# Allegro board sld_hw01.brd
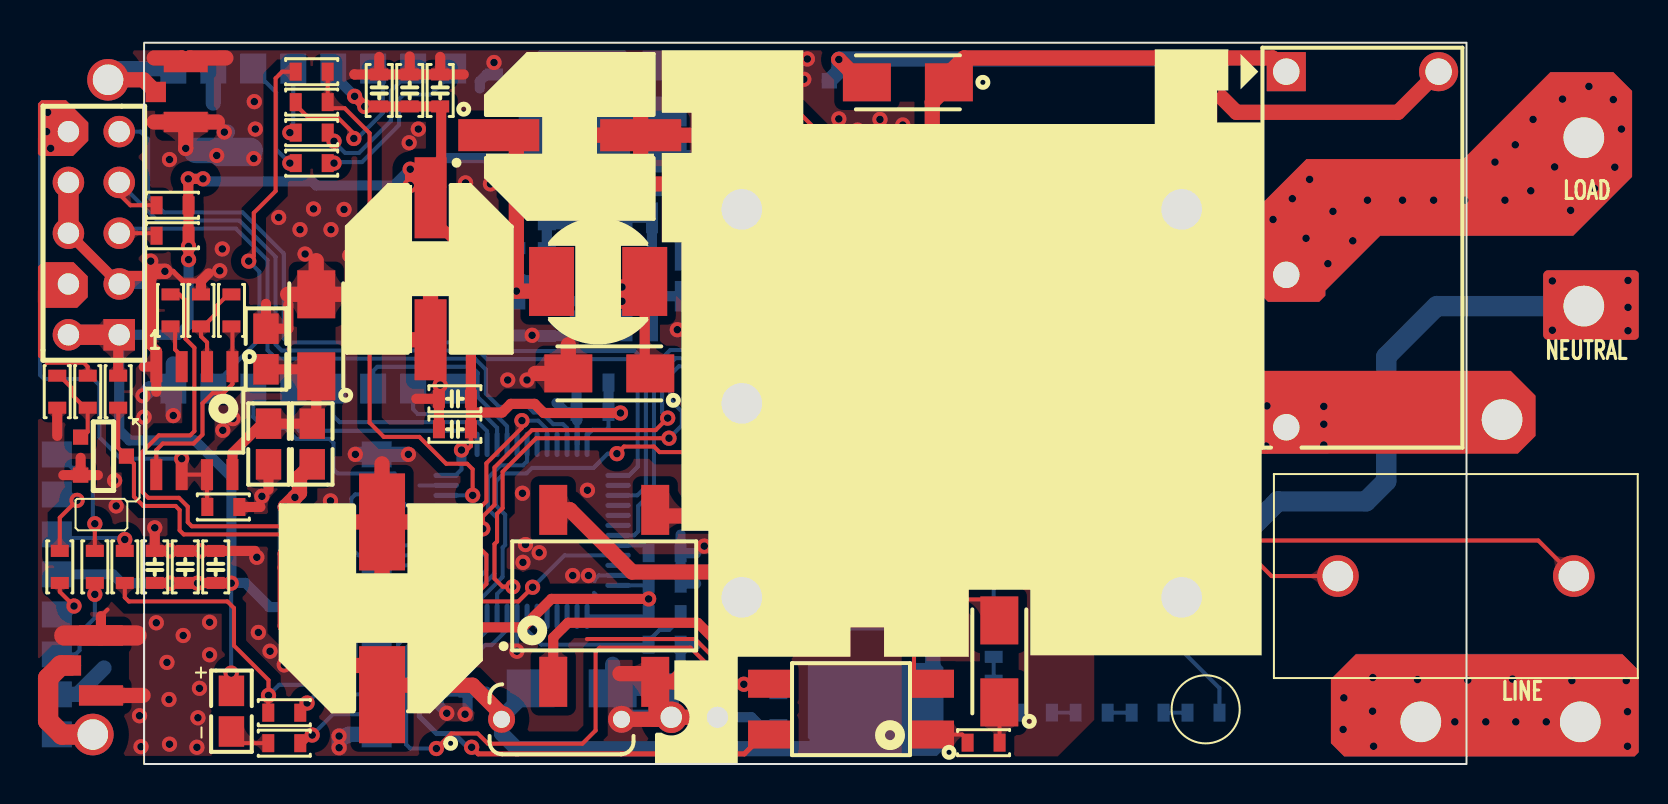
[diagram p0: board, top side]
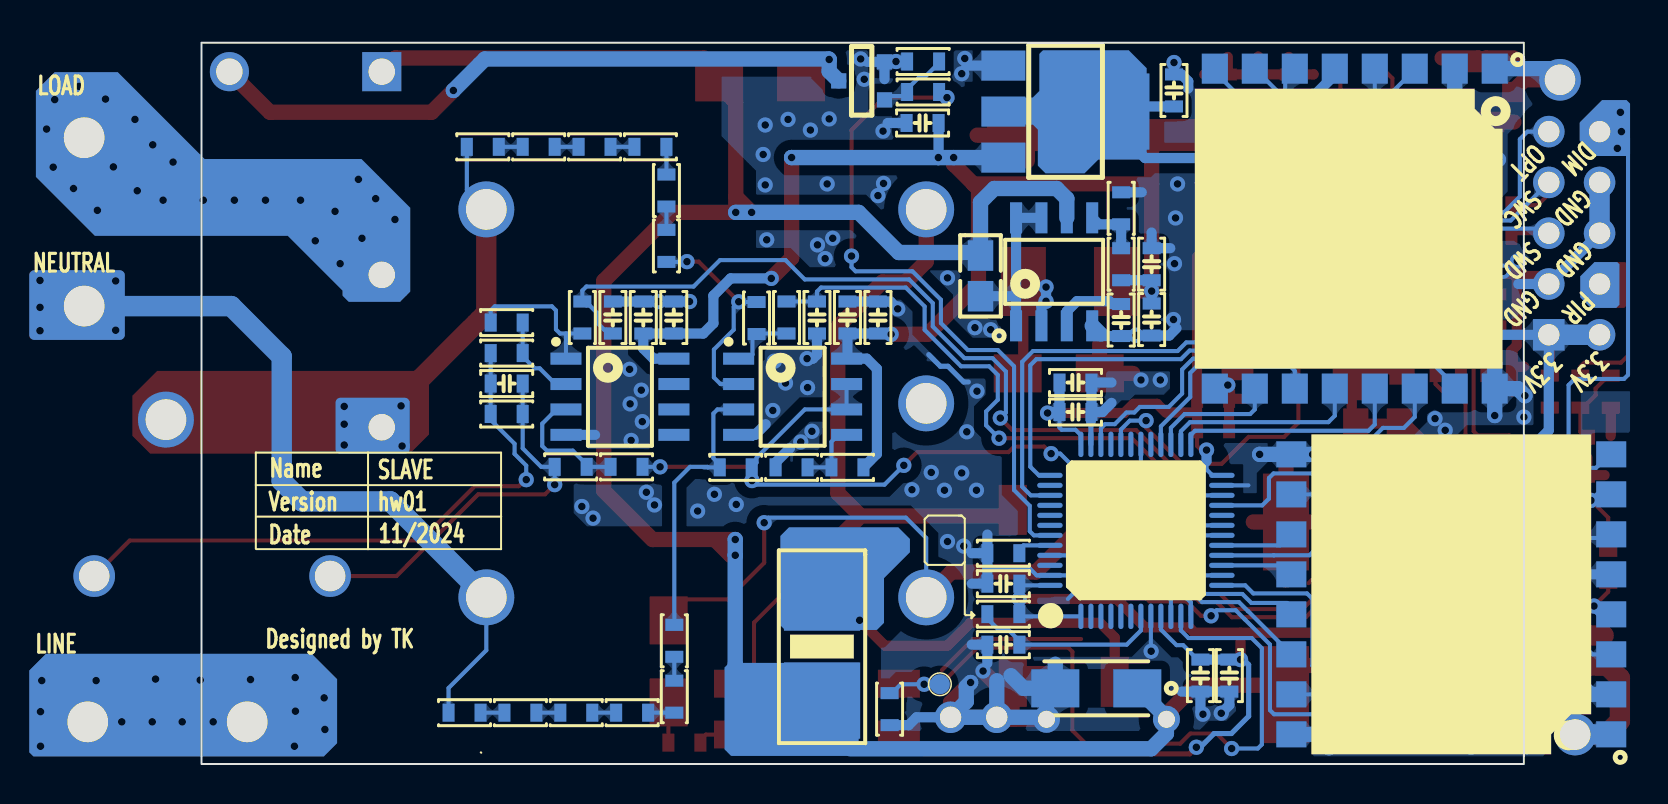
[diagram p1: board, bottom side, seen from below]

Outline 66.14 x 36.07 mm; copper layers: TOP, BOTTOM. Coordinates in mm from the lower left corner of the outline.
Outline path: rectangle 0,0 66.14,36.07

## Design rules (mm)
constraint set DEFAULT: min track width 0.203
nets with their own width: min track width 0.203; nets GND

## Placement (name value [footprint] x y rotation side)
C1  1uF  [C0603]  42.52 22.33 90 bottom
C2  0.1uF  [C0603]  3.58 9.86 90 top
C3  0.1uF  [C0603]  18.62 22.23 270 bottom
C4  0.1uF  [C0805]  6.22 16 0 top
C5  0.1uF  [C0603]  15.54 18.26 180 top
C6  1uF  [C0603]  15.54 16.74 180 top
C7  0.1uF  [C0603]  22.43 19.08 180 bottom
C8  1uF  [C0603]  22.43 17.6 180 bottom
C9  0.1uF  [C0603]  16.18 4.42 270 bottom
C10  1uF  [C0603]  14.73 4.42 270 bottom
C11  0.1uF  [C0603]  26.03 9.02 0 bottom
C12  0.1uF  [C0603]  26.03 5.97 0 bottom
C13  0.1uF  [C0603]  11.76 33.68 90 top
C14  0.01uF  [C0603]  18.62 24.99 90 bottom
C15  1uF  [C0603]  14.81 33.68 90 top
C16  470uF  [RAD_SIZE_F]  14.33 24.77 270 top
C17  470pF  [C0603]  20.14 22.2 270 bottom
C18  1uF  [C0603]  13.28 33.68 90 top
C19  0.1uF  [C0603]  44.04 22.33 90 bottom
C20  1uF  [C0603]  0.53 9.86 90 top
C21  0.1uF  [CAP104J100V]  20.88 2.24 0 top
C22  220uF  [CASE_G]  11.9 7.79 90 top
C23  1uF  [C0603]  2.06 9.86 90 top
C24  0.01uF  [C0603]  35.36 22.33 270 bottom
C25  0.01uF  [C0603]  50.88 19.02 180 bottom
C26  0.01uF  [C0603]  45.57 22.33 90 bottom
C27  0.1uF  [C0603]  30.07 32.05 0 bottom
C28  0.1uF  [C0603]  17.5 33.68 90 bottom
C29  1uF  [C0603]  33.83 22.33 90 bottom
C30  0.1uF  [C0603]  32.31 22.33 90 bottom
C31  470uF  [RAD_SIZE_F]  21.28 31.45 0 top
CT1  -  [ZMCT103]  65.61 9.4 180 top
D1  1N4007WDITR  [DO_214AC]  42.77 5.13 90 top
D4  RB050L  [DO_214AC]  23.27 19.53 180 top
D6  1N4007WDITR  [DO_214AC]  38.2 34.09 180 top
D7  0805  [D0805]  4.37 2.64 0 top
D8  DB107S  [DB_1S]  23.01 8.41 90 top
DZ1  24V  [DO_214]  8.61 21.44 90 top
DZ2  36V  [DO_214]  21.39 3.78 0 bottom
J4  -  [HEADER2X5]  -2.52 26.54 90 top
L1  100uH  [CHOKESIZE6MM]  22.71 24.13 180 top
NOREF  -  []  -5.69 0 90 top
NOREF#2  -  []  -5.69 36.07 0 top
Q1  MMBT2222  [SOT_23]  31.98 33.21 90 bottom
Q2  MMBT2222  [SOT_23]  -3.18 16.34 270 top
R1  10K  [R0805]  6.1 20.75 180 top
R2  10K  [R0603]  -1.3 18.62 270 top
R3  10K  [R0603]  -2.82 18.62 270 top
R4  22K  [R0603]  41.99 1.07 180 top
R5  2.2K  [R0805]  8.41 16 180 top
R6  0  [R0603]  8.38 34.62 0 top
R7  10K  [R0603]  31.72 2.74 270 bottom
R8  10K  [R0603]  26.03 7.49 0 bottom
R9  10K  [R0603]  26.03 10.54 0 bottom
R10  470  [R0603]  1.32 22.68 270 top
R11  4.7K  [R0603]  2.84 22.68 90 top
R12  10K  [R0603]  4.37 22.68 270 top
R13  10K  [R0603]  3.96 12.85 0 top
R14  2.2K  [R0603]  30.05 33.6 0 bottom
R15  10K  [R0603]  30.05 35.13 0 bottom
R17  2.2K  [R0603]  7.01 1.04 0 top
R18  2.2K  [R0603]  1.42 26.42 180 top
R19  2.2K  [R0603]  1.42 27.94 180 top
R20  0.33  [R0805]  27.18 24.41 180 bottom
R21  4.7K  [R0603]  20.14 24.99 90 bottom
R22  1.5K  [R0603]  20.14 27.79 90 bottom
R23  0  [R0603]  7.01 2.57 180 top
R24  56K  [R0603]  -4.34 18.62 270 top
R25  56  [R0603]  50.88 17.5 0 bottom
R26  10K  [R0603]  50.88 20.55 0 bottom
R27  10K  [R0603]  47.67 14.86 0 bottom
R28  49.9k  [R0603]  44.88 14.86 180 bottom
R29  49.9k  [R0603]  50.88 22.07 0 bottom
R30  0  [R0603]  8.38 31.57 0 top
R31  0  [R0603]  8.38 30.05 0 top
R32  0  [R0603]  8.38 33.1 180 top
R33  0.01  [R2512]  35.1 5.87 270 bottom
R34  0  [R0603]  -4.22 9.86 90 top
R35  0  [R0603]  -2.46 9.86 90 top
R36  0  [R0603]  -0.97 9.86 90 top
R37  300k  [R0603]  52.07 30.86 180 bottom
R38  300k  [R0603]  49.27 30.86 180 bottom
R39  300k  [R0603]  46.48 30.86 180 bottom
R40  300k  [R0603]  43.69 30.86 180 bottom
R41  300k  [R0603]  42.89 28.68 270 bottom
R42  300k  [R0603]  42.89 25.91 270 bottom
R43  4.99k  [R0603]  38.38 22.3 270 bottom
R44  1k  [R0603]  36.88 22.33 90 bottom
R45  300k  [R0603]  52.98 2.57 180 bottom
R46  300k  [R0603]  50.19 2.57 180 bottom
R47  300k  [R0603]  47.4 2.57 180 bottom
R48  300k  [R0603]  44.6 2.57 180 bottom
R49  300k  [R0603]  42.49 3.37 90 bottom
R50  300k  [R0603]  42.49 6.16 90 bottom
R51  4.99k  [R0603]  39.42 14.83 180 bottom
R52  10K  [R0603]  33.83 14.83 0 bottom
R53  4.99k  [R0603]  36.63 14.83 0 bottom
R54  1k  [R0603]  47.09 22.33 90 bottom
RE1  ALQ324  [RELAY_SPST_20MX10MX10M]  60.93 25.73 270 top
T1  Test_Point_Pwr_60  [TEST_POINT_PWR_60]  -1.8 34.21 0 top
T2  Test_Point_Pwr_80  [TEST_POINT_PWR_80]  63.85 2.11 180 bottom
T3  ZERO  [TESTPOINT_SIG]  29.21 3.99 180 bottom
T6  Test_Point_Pwr  [TEST_POINT_PWR]  26.36 2.34 180 bottom
T7  Test_Point_Pwr  [TEST_POINT_PWR]  28.68 2.34 180 bottom
T12  Test_Point_Pwr_60  [TEST_POINT_PWR_60]  -2.57 1.47 0 top
T13  Test_Point_Pwr_80  [TEST_POINT_PWR_80]  67.92 17.22 0 top
T14  Test_Point_Pwr_80  [TEST_POINT_PWR_80]  71.83 2.11 0 top
T15  Test_Point_Pwr_80  [TEST_POINT_PWR_80]  72.01 31.32 0 top
T16  Test_Point_Pwr_80  [TEST_POINT_PWR_80]  72.01 22.9 0 top
U1  PC817  [SOT254P900X350-4N]  35.36 2.74 180 top
U2  SMD_MINI  [ANTENNA_MOUNT]  2.08 33.6 180 top
U3  STM32F071C8T6  [LQFP_48]  19.41 11.68 180 bottom
U4  RFM69HCW_868/RFM22B_433  [RFM22B_S2]  8.46 26.77 270 bottom
U6  MC34063  [SOIC8]  23.49 24.61 90 bottom
U7  SMD_MINI  [ANTENNA_MOUNT]  -2.16 4.93 180 top
U8  AMS1117-3V3  [SOT_223_3]  26.03 34.92 270 bottom
U9  12VAC  [ZN35135BA_220V24V]  40.89 18.03 180 top
U10  LM358  [SOIC8]  45.21 18.36 180 bottom
U11  RFM69HCW_868/RFM22B_433  [RFM22B_S2]  3.63 8.48 0 bottom
U12  LM358  [SOIC8]  36.57 18.36 180 bottom
U14  LM358  [SOIC8]  2.51 17.17 270 top

## Library data of the parts
C1-C3 C5-C15 C17-C20 C23-C30 = NPOL_CAP: User Part Number: ***
C4 C21 = NPOL_CAP
C16 C22 C31 = POL_CAP
CT1 = ZMCT103
D1 D4 D6 = DIODE_AC
D7 = LED
D8 = DIODE_BRIDGE_2
DZ1 DZ2 = ZENER
J4 = HEADER2X5
L1 = IND_FERRITE
Q1 Q2 = BJT_NPN
R1 R5 R20 R33 = RES
R2-R4 R6-R15 R17-R19 R21-R24 R26-R32 R34-R54 = RES: User Part Number: ***
R25 = RESR: User Part Number: ***
RE1 = RELAY_24V_MINI
T1-T3 T6 T7 T12-T16 = TestPoint
U1 = PC817
U2 U7 = ANT_SMD_MINI
U3 = STM32F103_48P
U4 U11 = RFM69HCW
U6 = MC34063_2
U8 = LM1117X_4P
U9 = ZN35150BA: Tolerance: ***; User Part Number: ***
U10 U12 = LM358_0
U14 = LM358_4

## Footprints (pads in the part's own frame, mm; a bottom-side part is the same pattern mirrored in y, then rotated)
ANTENNA_MOUNT
  rect 2.2x1.02 smd: 1(0,1.5) 2(0,-1.5)
  rect 1.016x1.016 smd: 3(1.5,0)
C0603
  rect 0.6x0.9 smd: 1(-0.8,0) 2(0.8,0)
C0805
  rect 1.27x1.524 smd: 1(0,1.016) 2(0,-1.016)
CAP104J100V
  round 1.35 hole 0.85: 1(-3,0) 2(3,0)
CASE_G
  rect 4.85x2.3 smd: 1(-4.318,0) 2(4.318,0)
CHOKESIZE6MM
  rect 2.25x3.45 smd: 1(-2.33,0) 2(2.33,0)
D0805
  rect 1.27x1.524 smd: 1(0,1.016) 2(0,-1.016)
DB_1S
  rect 2.5x1.4 smd: 1(-4.3,2.55) 2(-4.3,-2.55) 3(4.3,-2.55) 4(4.3,2.55)
DO_214
  rect 2.4x1.9 smd: 1(2.05,0) 2(-2.05,0)
DO_214AC
  rect 2.4x1.9 smd: A(2.05,0) C(-2.05,0)
HEADER2X5
  rect 1.575x1.575 hole 1.067: 1(-5.08,-1.27)
  round 1.575 hole 1.067: 2(-5.08,1.27) 3(-2.54,-1.27) 4(-2.54,1.27) 5(0,-1.27) 6(0,1.27) 7(2.54,-1.27) 8(2.54,1.27) 9(5.08,-1.27) 10(5.08,1.27)
LQFP_48
  oval 0.254x1.27 smd: 1(-2.75,-4.3) 2(-2.25,-4.3) 3(-1.75,-4.3) 4(-1.25,-4.3) 5(-0.75,-4.3) 6(-0.25,-4.3) 7(0.25,-4.3) 8(0.75,-4.3) 9(1.25,-4.3) 10(1.75,-4.3) 11(2.25,-4.3) 12(2.75,-4.3) 25(2.75,4.3) 26(2.25,4.3) 27(1.75,4.3) 28(1.25,4.3) 29(0.75,4.3) 30(0.25,4.3) 31(-0.25,4.3) 32(-0.75,4.3) 33(-1.25,4.3) 34(-1.75,4.3) 35(-2.25,4.3) 36(-2.75,4.3)
  oval 1.27x0.254 smd: 13(4.3,-2.75) 14(4.3,-2.25) 15(4.3,-1.75) 16(4.3,-1.25) 17(4.3,-0.75) 18(4.3,-0.25) 19(4.3,0.25) 20(4.3,0.75) 21(4.3,1.25) 22(4.3,1.75) 23(4.3,2.25) 24(4.3,2.75) 37(-4.3,2.75) 38(-4.3,2.25) 39(-4.3,1.75) 40(-4.3,1.25) 41(-4.3,0.75) 42(-4.3,0.25) 43(-4.3,-0.25) 44(-4.3,-0.75) 45(-4.3,-1.25) 46(-4.3,-1.75) 47(-4.3,-2.25) 48(-4.3,-2.75)
R0603
  rect 0.6x0.9 smd: 1(-0.8,0) 2(0.8,0)
R0805
  rect 1.27x1.524 smd: 1(0,1.016) 2(0,-1.016)
R2512
  rect 3.81x3.81 smd: 1(-2.7,0) 2(2.7,0)
RAD_SIZE_F
  rect 4.05x1.6 smd: 1(-3.55,0) 2(3.55,0)
RELAY_SPST_20MX10MX10M
  rect 1.956x1.956 hole 1.321: 1(-8.89,-3.81)
  round 1.956 hole 1.321: 2(-8.89,3.81) 3(1.27,-3.81) 4(8.89,-3.81)
RFM22B_S2
  rect 1.501x1.301 smd: 1(-8,7) 2(-8,5) 3(-8,3) 4(-8,1) 5(-8,-1) 6(-8,-3) 7(-8,-5) 8(-8,-7) 9(8,-7) 10(8,-5) 11(8,-3) 12(8,-1) 13(8,1) 14(8,3) 15(8,5) 16(8,7)
SOIC8
  rect 1.55x0.6 smd: 1(-2.7,1.905) 2(-2.7,0.635) 3(-2.7,-0.635) 4(-2.7,-1.905) 5(2.7,-1.905) 6(2.7,-0.635) 7(2.7,0.635) 8(2.7,1.905)
SOT254P900X350-4N
  rect 2.1x1.4 smd: 1(-4.1,1.27) 2(-4.1,-1.27) 3(4.1,-1.27) 4(4.1,1.27)
SOT_23
  rect 0.762x0.762 smd: 1(0,0) 2(1.9,0) 3(0.95,2.291)
SOT_223_3
  rect 1.5x2.2 smd: 1(0,0) 2(2.3,0) 3(4.6,0)
  rect 3.81x2.007 smd: 4(2.3,6.3)
TEST_POINT_PWR
  round 1.575 hole 1.067: 1(0,0)
TEST_POINT_PWR_60
  round 2.083 hole 1.524: 1(0,0)
TEST_POINT_PWR_80
  round 2.794 hole 2.032: 1(0,0)
TESTPOINT_SIG
  round 1 smd: 1(0,0)
ZMCT103
  round 2.083 hole 1.524: 1(-5.9,0) 2(5.9,0)
ZN35135BA_220V24V
  round 2.794 hole 2.032: 1(-11,9.7) 2(-11,-9.7) 3(11,9.7) 4(11,0) 5(11,-9.7)

## Nets
5V: C1.1 C3.1 C14.1 C19.1 C27.1 C29.1 C30.1 C31.1 L1.2 R21.1 R52.1 U8.3 U10.8(V+) U12.8(V+)
24V: C21.1 C22.1 D6.C(CATHODE) DZ2.2(CATHODE) R5.1 R20.1 R33.2 RE1.1 U6.6(VCC)
24VAC1: D8.3 U1.2 U9.5
24VAC2: D1.A D8.4 U9.3
+3.3V: C2.1 C5.1 C6.1 C7.1 C8.1 C9.1 C10.1 C11.1 C13.1 C15.1 C16.1 C18.1 C20.1 C23.1 C28.1 D7.1 J4.1 J4.2 R2.1 R8.1 R18.1 R19.1 U1.4 U3.1 U3.9 U3.24 U3.36 U3.48 U4.5(VCC) U8.2 U8.4(OUT_PAD) U11.5(VCC)
GND: C1.2 C2.2 C3.2 C4.2 C5.2 C6.2 C7.2 C8.2 C9.2 C10.2 C11.2 C12.2 C13.2 C14.2 C15.2 C16.2 C17.2 C18.2 C19.2 C20.2 C21.2 C22.2 C23.2 C24.2 C26.2 C27.2 C28.2 C29.2 C30.2 C31.2 D4.A D8.2(AC2) DZ1.1 DZ2.1 J4.3 J4.6 J4.8 Q1.2 Q2.2 R1.2 R7.2 R9.2 R11.2 R13.2 R15.2 R22.2 R24.2 R53.2 T6.1(T) T7.1(T) U2.1 U2.2(GND1) U3.8 U3.23 U3.35 U3.47(VSS_3) U4.2 U4.9 U4.16 U6.4 U7.1 U7.2(GND1) U8.1 U10.4 U11.2 U11.9 U11.16 U12.4 U14.4
AC_LINE: R37.1 RE1.4 T13.1(T) U9.2(N)
AC_LINE_IN: T2.1(T) T14.1(T)
AC_LOAD: RE1.3 T15.1(T)
AC_NEUTRAL: R45.1 T16.1(T) U9.1
BTN1: U3.29
CUR_ADC: C26.1 R54.2 U3.19
LED1: R17.2 U3.45
MISO: U3.16 U11.10
MOSI: U3.17 U11.11
N15558930_RF4: R30.1 U4.4
N15558930_RF5: R34.1 U11.4
N15558945_RF4: R31.1 U4.3
N15558945_RF5: R35.1 U11.3
N15601498_RF4: T1.1(T) U2.3 U4.1
N15601498_RF5: T12.1(T) U7.3 U11.1
N15650649_RF4: R31.2 U4.8
N15650649_RF5: R35.2 U11.8
N15650655_RF4: R30.2 U4.7
N15650655_RF5: R34.2 U11.7
N15650752_RF4: R32.2 U4.6
N15650752_RF5: R36.2 U11.6
N15650833_RF4: R6.1 U4.15
N15650833_RF5: R23.1 U11.15
OPT: J4.9 U3.39
PB2: U3.20
PB5: U3.41
PB9: U3.46
PC13: U3.2
PIR_IN: J4.4 R3.1
RF_INT: R23.2 R36.1 U3.13
RF_RST: U3.30 U11.14
SCK: U3.15 U11.12
SPI2_INT: R6.2 R32.1 U3.22
SPI2_MISO: U3.27 U4.10
SPI2_MOSI: U3.28 U4.11
SPI2_RES: U3.21 U4.14
SPI2_SCK: U3.26 U4.12
SPI2_SS: U3.25 U4.13
SS: U3.18 U11.13
VOL_ADC: C24.1 R44.2 U3.10
VREF_ADC: R28.2 R51.2 U3.12 U12.6 U12.7
ZDET: R7.1 T3.1(T) U1.3(EMITTER) U3.11
N00867: R10.1 U3.14
N00967: R14.1 U3.43
N15474073: C12.1 R8.2 U3.7
N15474105: R9.1 U3.44
N15491277: D7.2(CATHODE) R17.1
N15550331: Q2.1 R3.2 R24.1
N15564877: D1.C(CATHODE) R4.1
N15564897: R4.2 U1.1
N15565413: Q1.1 R14.2 R15.1
N15565460: D6.A Q1.3(E) RE1.2(DC-)
N15594848: R10.2 U14.3
N15594876: R12.2 U14.1 U14.5
N15594888: R11.1 R12.1 U14.2
N15595203: D8.1 R33.1
N15595433: C4.1 DZ1.2(CATHODE) R1.1 R5.2 U14.8(V+)
N15595748: J4.10 R13.1 U14.6 U14.7
N15595994: J4.5 R18.2 U3.34
N15596016: J4.7 R19.2 U3.37
N15599824: R37.2 R38.1
N15599840: R38.2 R39.1
N15599857: R39.2 R40.1
N15599867: R40.2 R41.1
N15599873: R41.2 R42.1
N15599887: R45.2 R46.1
N15599893: R46.2 R47.1
N15599899: R47.2 R48.1
N15599905: R48.2 R49.1
N15599911: R49.2 R50.1
N15600412: R42.2 R43.1 U12.2
N15600419: R50.2 R51.1 U12.3
N15600461: R43.2 R44.1 U12.1
N15606589: Q2.3(E) R2.2 U3.32
N15830972: D4.C(CATHODE) L1.1 U6.2
N15831035: R52.2 R53.1 U12.5
N15831096: R20.2 U6.1 U6.7 U6.8
N15831168: C17.1 U6.3
N15831176: R21.2 R22.1 U6.5
N15832751: C25.1 CT1.1 R25.2 R26.2
N15832799: C25.2 CT1.2 R25.1 R27.2
N15832926: R27.1 R28.1 U10.3
N15832941: R26.1 R29.1 U10.2
N15833292: R29.2 R54.1 U10.1

Pads without a net: U3 3 4 5 6 31 33 38 40 42; U9 4; U10 5 6 7

## Via types
v1: diameter 0.762, hole 0.381, TOP to BOTTOM, 265 vias

## Routing (per net, layer and track width the routed paths; a pad name or vN(x,y) marks a point on that pad's centre or on a via; arc(x,y) is an arc through that point)
5V: length 76.3
  TOP w0.762: 27.53,29.01 28.52,29.99 v1(28.52,30.33) v1(29.29,30.33) ; 27.53,29.01 18.62,29.01 ; 27.53,29.01 27.28,28.75 27.28,24.03 29.82,21.49 v1(31.65,21.49) ; v1(37.64,24.28) 36.63,25.3 v1(36.63,30.33) 36.62,30.33 ; L1.2 19.9,23.65 v1(18.62,23.65) 18.62,29.01 ; 18.62,29.01 18.62,30.94 18.11,31.45 C31.1
  BOTTOM w0.508: R52.1 32.36,15.51 32.36,19.76 32.87,20.27 U12.8 33.83,20.31 C29.1 C30.1 31.69,21.53 v1(31.65,21.49) ; v1(37.64,24.28) 39.67,24.28 40.54,23.42 40.54,22.03 41.05,21.53 C1.1 C19.1 44.04,20.78 43.53,20.27 U10.8 ; v1(28.52,30.33) 28.52,30.33 29.27,30.33 C27.1 ; C14.1 18.62,24.19 v1(18.62,23.65) ; C14.1 R21.1 ; C14.1 C3.1
  BOTTOM w0.762: U8.3 v1(28.52,30.33) v1(29.29,30.33) 36.62,30.33 v1(36.63,30.33)
24V: length 126.3
  TOP w0.762: 39.42,28.38 v1(39.42,27.58) ; 39.42,28.38 v1(38.63,27.58) v1(39.42,27.58) ; 39.42,28.38 39.42,33.1 40.25,33.93 D6.C 40.25,34.54 41.01,35.31 56.44,35.31 RE1.1 ; v1(39.42,27.58) 42.59,27.58 46.02,24.16 46.02,13.67 43.58,11.22 40.46,11.22 ; 40.46,11.22 v1(39.45,11.22) v1(39.45,10.44) 39.67,10.44 40.46,11.22 ; v1(7.06,12.85) v1(7.54,13.34) 7.77,13.56 7.77,14.35 R5.1 ; C21.1 17.88,2.49 16.43,3.94 12.37,3.94 C22.1 11.9,4.17 11.14,4.93 9.04,4.93 7.06,6.91 v1(7.06,9.82) v1(7.06,10.52)
  BOTTOM w0.762: 39.45,4.11 v1(39.45,10.44) v1(39.45,11.22) ; v1(7.06,9.82) v1(7.06,10.52) v1(7.06,12.85) v1(7.54,13.34) ; v1(39.42,27.58) v1(38.63,27.58) 33.27,27.58 31.27,25.58 27.33,25.58 R20.1 27.18,28.09 26.49,28.78 23.37,28.78 22.86,28.27 U6.6 ; DZ2.2 17.88,2.33 C21.1 17.88,1.52 18.64,0.76 33.7,0.76
24VAC1: length 37.5
  TOP w0.203: 35.12,10.45 38.51,7.07 38.51,4.22 38.71,4.01 U1.2
  TOP w0.762: D8.3 25.87,12.4 33.17,12.4 ; 33.17,12.4 34.31,13.55 34.31,21.87 32.08,24.1 30.91,24.1 29.89,25.12 U9.5 ; 33.17,12.4 35.12,10.45
24VAC2: length 31.3
  TOP w0.203: v1(38,12.06) 38,10.06 39.83,8.23 42.57,8.23 42.77,8.03 D1.A
  TOP w0.762: U9.3 28.63,9.6 24.41,9.6 21.3,12.71 D8.4
  BOTTOM w0.203: U9.3 29.89,11.3 30.91,12.32 37.79,12.32 38,12.12 v1(38,12.06)
+3.3V: length 186.3
  TOP w0.203: v1(4.36,4.55) 4.36,3.67 D7.1 ; C6.1 16.34,15.9 16.14,15.7 v1(15.87,15.7)
  TOP w0.254: v1(16.38,0.84) 16.71,0.51 30.02,0.51 30.99,1.47 U1.4
  TOP w0.508: 9.6,7.11 v1(8.76,7.11) v1(8.76,7.85) 8.86,7.85 9.6,7.11 ; 9.6,7.11 10.15,6.56 14.17,6.56 ; C15.1 14.78,32.85 ; C15.1 14.86,32.83 14.86,28.85 C16.1 ; C15.1 C18.1 C13.1 v1(11.04,32.88) v1(10.53,33.39) ; 13.31,29.33 13.82,29.33 14.33,28.82 ; 13.31,29.33 v1(13.31,28.93) 13.71,28.93 C16.1 ; 13.31,29.33 v1(13.31,29.74) 13.82,29.74 14.33,29.24 14.33,28.82 ; C16.1 14.33,28.82 ; C16.1 14.33,27.38 16.34,25.36 C5.1 16.34,17.58 ; v1(1.32,9.04) v1(2.67,9.04) ; C20.1 C23.1 C2.1 3.59,9.04 v1(4.36,9.04) ; R2.1 -1.3,21.41 J4.1 ; v1(25.23,8.26) 20.37,8.26 18.95,6.83 16.74,6.83 16.47,6.56 14.17,6.56 ; v1(14.17,5.22) 14.17,6.56 ; v1(2.22,25.22) v1(2.22,25.88) R18.1 R19.1 2.21,27.95 v1(2.21,29.26) v1(2.95,29.26) ; v1(23.82,17.55) 19.99,17.55 19.53,18.01 18.34,18.01 17.91,17.58 16.34,17.58 ; 16.34,17.58 C6.1
  TOP w1.016: J4.2 J4.1
  BOTTOM w0.203: U3.1 25.12,7.38 R8.1 ; v1(4.36,4.55) v1(4.36,9.04) ; U3.48 25.15,8.93 C11.1 ; C9.1 16.32,5.22 17.04,5.94 17.37,5.94 18.16,6.73 U3.9 ; U3.36 22.16,16.44 22.43,16.71 23.11,16.71 23.23,16.83 C8.1 ; 15.87,15.14 15.87,14.73 15.58,14.43 U3.24
  BOTTOM w0.254: v1(14.17,5.22) 14.02,5.22 13.77,4.97 13.77,2.39 14.63,1.52 15.49,1.52 16.18,0.84 v1(16.38,0.84)
  BOTTOM w0.508: R8.1 v1(25.23,8.26) C11.1 ; 14.12,29.74 14.32,29.74 14.88,30.3 18.95,30.3 20.62,31.98 ; 14.12,29.74 v1(13.31,29.74) ; 14.12,29.74 v1(13.31,28.93) ; v1(2.22,25.88) v1(2.22,25.22) 2.22,21.97 1.71,21.46 J4.1 -1.25,16.69 -0.74,16.18 2.54,16.18 4.37,14.35 4.37,9.06 ; 4.37,9.06 5.07,9.06 6.25,7.87 6.25,7.85 8,7.85 ; 4.37,9.06 v1(4.36,9.04) v1(2.67,9.04) v1(1.32,9.04) -1.12,9.04 -1.56,9.48 U11.5 ; 12.5,28.93 8.61,28.93 8.41,29.13 3.07,29.13 v1(2.95,29.26) v1(2.21,29.26) ; 12.5,28.93 v1(13.31,29.74) ; 12.5,28.93 v1(13.31,28.93) ; v1(14.17,5.22) C10.1 C9.1 ; 23.41,17.55 v1(23.82,17.55) 23.77,17.6 C8.1 C7.1 ; v1(13.31,29.74) v1(13.31,28.93) ; 8,7.85 8.74,7.11 v1(8.76,7.11) v1(8.76,7.85) 8,7.85 ; U4.5 9.46,34.46 v1(10.53,33.39) v1(11.04,32.88) ; C28.1 19.14,32.88 ; v1(15.87,15.7) 15.87,15.14
  BOTTOM w1.016: J4.1 J4.2
GND: length 214.9
  TOP w0.203: 3.66,35.1 U2.2 0.5,35.1 ; 22.15,6.25 27.56,6.25 29.11,4.7 ; 10.77,9.04 10.16,9.65 10.16,9.73 ; -2.16,7.39 -1.83,7.72
  TOP w0.254: v1(1.04,24.64) 1.45,24.64 1.93,24.16 2.84,24.16
  TOP w0.508: -0.02,19.87 U14.4 ; U14.4 0.63,19.9 0.63,20.65 0.35,20.93 0.35,24.33 0.28,24.41 -0.84,24.41 J4.3 J4.6 ; U14.4 0.61,18.61 ; 7.21,22.98 7.21,21.77 R1.2 6.1,23.01 ; U7.2 -2.16,7.39 ; C5.2 C6.2 ; C5.2 13.61,18.26 ; C5.2 14.74,18.89 ; C13.2 10.53,34.48 10.51,34.49 ; C13.2 11.76,35.36 ; C13.2 C18.2 ; Q2.2 -4.04,14.45 ; Q2.2 -2.31,14.45 ; Q2.2 -3.18,15.31 ; 13.28,35.38 C18.2 ; C18.2 C15.2 ; C16.2 14.74,20.8 14.74,18.89 ; 14.74,18.89 v1(14.81,18.95) ; C15.2 14.81,35.36 ; C15.2 15.99,34.48 ; 5.55,10.66 C2.2 v1(2.82,10.66) C23.2 v1(1.29,10.66) C20.2 v1(0.53,11.81) ; R13.2 5.82,12.85 ; 3.22,24.54 2.84,24.16 R11.2 ; R24.2 -4.34,16.41 ; C4.2 6.22,13.72
  TOP w0.762: 14.33,23.72 C16.2 13.04,21.21 ; C22.2 10.27,12.1 ; C22.2 11.9,15.01 ; C22.2 11.9,9.2 ; C22.2 13.53,12.1 ; DZ1.1 10.04,23.49 ; DZ1.1 8.61,25.17 ; DZ1.1 7.18,23.49 ; 0.28,24.41 0.51,24.64 v1(1.04,24.64) ; 23.8,4.52 25.15,4.52 D8.2 25.6,4.11 ; 21.22,20.97 D4.A 19.56,19.53 ; v1(27.05,4.65) 26.51,4.11 25.6,4.11 ; U2.1 0.5,32.1 ; U2.1 3.66,32.1 ; U2.1 v1(2.08,30.78) ; C21.2 25.53,2.24 ; 25.53,2.24 25.6,2.31 25.6,4.11 ; 25.53,2.24 26.26,2.24 T6.1 T7.1 28.68,3.07 v1(27.67,4.08) ; C31.2 24.83,30.16 ; C31.2 22.33,31.45 ; C31.2 27.34,31.45 ; C31.2 24.83,32.73 ; 0.51,35.31 1.88,35.31 U2.2 2.28,35.31 4.09,35.31 ; U7.1 -0.05,3.43
  TOP w1.016: J4.6 J4.8 ; -3.99,6.43 U7.2 -0.38,6.43
  BOTTOM w0.203: 22.5,8.56 22.81,8.26 ; 18.66,5.91 U3.8 ; 22.53,9.14 22.53,9.22 22.74,9.43 U3.47 24.37,9.43 24.72,9.79 24.73,9.78 26.83,9.78 ; U3.23 13.78,13.93 ; 27.68,8.94 27.61,9.02
  BOTTOM w0.254: 27.79,19.1 28.02,19.1 28.8,19.89 29.18,19.89 29.77,20.47 ; U3.35 21.66,17.16
  BOTTOM w0.508: v1(41.73,23.13) C1.2 v1(43.28,23.13) C19.2 C26.2 ; C29.2 C30.2 31.69,23.13 v1(31.32,22.76) ; R9.2 27.62,10.54 ; R9.2 C11.2 27.61,9.02 ; R9.2 26.83,11.47 ; U4.9 15.06,18.77 14.88,18.95 v1(14.81,18.95) ; U10.4 46.46,16.46 ; C9.2 17.11,3.62 ; C9.2 16.18,2.62 v1(16.05,2.49) ; C9.2 C10.2 14.73,2.95 v1(15.14,2.54) ; R7.2 30.77,1.94 30.38,2.34 T7.1 ; 21.18,21.5 21.08,21.4 C17.2 20.12,21.42 C3.2 17.74,21.42 17.37,21.79 ; C8.2 21.08,17.6 20.62,18.06 ; C8.2 C7.2 20.62,19.08 ; C8.2 21.66,17.57 21.66,17.16 ; 37.92,16.99 38.45,16.46 U12.4 ; 17.69,25.79 C14.2 18.62,26.58 ; R22.2 19.11,28.59 ; J4.6 J4.3 0.28,24 ; C24.2 35.36,20.47 35.56,20.27 v1(35.85,20.27) ; 16.79,33.78 16.79,34.14 17.13,34.48 C28.2 v1(17.5,35.08) ; R53.2 37.43,15.07 36.7,15.8 ; Q1.2 31.96,35.13 v1(31.4,35.13) R15.2 ; Q1.2 32.84,35.11 ; Q1.2 31.98,34.25 ; 26.83,5.04 C12.2 27.62,5.97 ; C27.2 31.83,32.05 ; U8.1 27.89,34.92
  BOTTOM w0.762: DZ2.1 23.88,3.34 C21.2 23.98,2.34 T6.1 ; DZ2.1 23.44,4.99 ; DZ2.1 25.02,3.78 25.65,4.42 ; v1(5.49,30.28) 3.73,30.28 3.33,30.68 ; 21.18,21.5 U6.4 ; v1(27.67,4.08) 27.89,3.86 27.89,3.12 T7.1 T6.1 ; T6.1 26.36,4.17 ; v1(-0.05,18.41) 0.3,18.77 U4.16 ; v1(10.57,15.48) U11.9 v1(13.22,15.48) ; -2.01,4.8 -3.32,3.48 U11.2 ; U4.16 1.46,20 ; U4.16 v1(1.46,17.42) ; v1(9.75,0.81) v1(9.75,1.4) 10.13,1.4 10.22,1.48 U11.16 ; v1(4.01,31.6) 4.16,31.6 ; U4.2 3.46,33.05
  BOTTOM w1.016: J4.8 J4.6
  BOTTOM w1.27: 2.59,30.68 5.31,30.68
  vias: v1(-1.47,14.17) v1(-1.4,12.9) v1(-0.23,2.41) v1(-0.15,0.86) v1(0,17.35) v1(0.33,25.15) v1(0.61,7.06) v1(1.14,5.08) v1(1.24,3.23) v1(1.27,30.23) v1(1.27,0.99) v1(1.95,6.43) v1(2.64,0.84) v1(2.69,2.31) v1(2.77,3.78) v1(3.28,7.09) v1(3.28,5.46) v1(3.63,30.43) v1(3.78,24.66) v1(3.91,25.76) v1(3.94,16.69) v1(4.44,17.27) v1(5.51,33.12) v1(5.56,31.75) v1(5.64,10.34) v1(5.71,6.58) v1(5.89,13.39) v1(6.3,5.64) v1(6.73,27.33) v1(7.01,4.95) v1(7.8,26.72) v1(8.05,25.5) v1(8.47,27.76) v1(8.71,12.45) v1(9.35,26.72) v1(9.32,13.16) v1(9.37,11.73) v1(10,27.73) v1(10.29,25.43) v1(12.27,24.28) v1(12.34,22.1) v1(12.44,25.98) v1(12.52,27.58) v1(13.26,31.06) v1(13.71,31.75) v1(13.66,25.43) v1(13.74,24.08) v1(15.11,24.59) v1(16.05,27.46) v1(16.08,29.06) v1(17.32,29.01) v1(17.42,27.3) v1(17.47,25.02) v1(17.52,22.23) v1(18.19,19.2) v1(18.64,5.64) v1(18.92,13.54) v1(18.95,10.08) v1(19.15,19.2) v1(19.07,10.97) v1(19.4,21.44) v1(19.76,10.57) v1(21.44,9.42) v1(22.17,13.69) v1(22.22,9.42) v1(26.67,21.72) v1(27.35,18.64) v1(27.46,21.82) v1(27.38,13.69) v1(27.86,16.61) v1(27.96,35.28) v1(28.02,10.9) v1(28.12,34.52) v1(28.12,14.55) v1(28.83,24.31) v1(28.83,11.13) v1(28.98,13.69) v1(29.64,14.58) v1(30.61,13.72) v1(32.05,31.65) v1(32.03,29.03) v1(32.31,28.42) v1(32.99,34.24) v1(33.17,35.26) v1(34.57,26.29) v1(34.75,32.26) v1(34.85,29.01) v1(34.95,25.27) v1(35.33,25.96) v1(35.61,16.64) v1(35.69,31.7) v1(35.83,18.82) v1(36.17,16.1) v1(36.8,32.23) v1(36.93,19.05) v1(37.49,20.14) v1(37.57,17.68) v1(37.95,31.95) v1(37.95,28.96) v1(37.87,26.21) v1(38.05,30.48) v1(39.39,12.98) v1(40.49,13.49) v1(41.32,12.65) v1(43.48,12.95) v1(43.89,13.59) v1(44.14,18.69) v1(44.09,17.12) v1(44.65,16.18) v1(44.73,19.74) v1(44.7,18.01) v1(46.56,12.29) v1(47.12,12.88)
AC_LINE: length 13.8
  TOP w1.016: 55.47,18.97 51.89,22.55 U9.2
  BOTTOM w0.203: U9.2 52.87,28.71 R37.1
  vias: v1(56.16,17.91) v1(56.11,15.9) v1(59,17.88) v1(59,16.99) v1(59,15.95)
AC_LINE_IN: length 16
  TOP w2.286: T2.1 v1(65.56,2.11) v1(67.11,2.11) v1(68.6,2.11) v1(70.13,2.11) T14.1
  BOTTOM w2.286: T2.1 v1(65.56,2.11) v1(67.11,2.11) v1(68.6,2.11) v1(70.13,2.11) T14.1
  vias: v1(60.01,3.31) v1(59.97,1.73) v1(61.45,4.32) v1(61.44,2.64) v1(61.49,0.89) v1(63.69,4.22) v1(66.2,4.2) v1(68.44,4.25) v1(71.41,4.17) v1(74.13,4.17) v1(74.19,2.62) v1(74.19,0.89)
AC_LOAD: length 36.4
  TOP w2.286: T15.1 v1(70.55,29.86) v1(69.35,28.66) 68.88,28.19 v1(68.06,28.19) v1(66.05,28.19) v1(64.5,28.19) v1(62.94,28.19) v1(61.19,28.19) 60.02,28.19 v1(59.46,27.64) v1(58.11,26.29) 57.12,25.3 RE1.3
  BOTTOM w2.286: RE1.3 57.12,25.3 v1(58.11,26.29) v1(59.46,27.64) 60.02,28.19 v1(61.19,28.19) v1(62.94,28.19) v1(64.5,28.19) v1(66.05,28.19) v1(68.06,28.19) 68.88,28.19 v1(69.35,28.66) v1(70.55,29.86) T15.1
  vias: v1(56.46,27.23) v1(57.43,28.27) v1(58.29,29.24) v1(59.21,25.02) v1(60.45,26.16) v1(67.56,30.1) v1(68.58,30.96) v1(69.47,32.23) v1(70.94,33.25) v1(71.35,27.69) v1(72.26,33.88) v1(72.54,28.78) v1(73.48,33.22) v1(73.56,29.84) v1(73.89,31.75)
AC_NEUTRAL: length 36.3
  BOTTOM w0.203: R45.1 53.78,3.8 51.89,5.69 U9.1
  BOTTOM w1.016: U9.1 56.69,13.13 61.11,13.13 62.13,14.15 62.13,20.37 64.65,22.9 T16.1
  vias: v1(70.43,24.16) v1(70.43,21.69) v1(74.22,24.18) v1(74.22,22.83) v1(74.22,21.67)
CUR_ADC: length 45.2
  TOP w0.203: v1(16.94,11.76) 16.94,12.38 17.52,12.96 17.52,14.83 19.39,16.7 25.59,16.7 v1(26.19,17.3)
  BOTTOM w0.203: C26.1 45.68,21.53 45.87,21.72 46,21.72 46.33,22.05 46.33,22.53 46.73,22.94 46.9,22.94 R54.2 47.09,23.67 46.89,23.88 41.53,23.88 40.21,25.2 36.93,25.2 35.97,24.23 30.75,24.23 29.56,23.05 29.56,21.88 27.98,20.29 26.58,20.29 25.91,19.62 25.91,17.58 v1(26.19,17.3) ; U3.19 16.74,11.93 16.92,11.76 v1(16.94,11.76)
LED1: length 21.9
  TOP w0.203: R17.2 8,1.04 v1(8.41,1.45) ; v1(19.43,8.84) 18.72,8.13 16.86,8.13 16.15,7.41 v1(15.65,7.41)
  BOTTOM w0.203: U3.45 21.03,10.43 v1(19.43,8.84) ; v1(8.41,1.45) 9.45,2.49 12.5,2.49 12.7,2.69 12.7,5.98 13.96,7.24 13.97,7.24 14.42,7.69 15.37,7.69 v1(15.65,7.41)
MISO: length 8.7
  BOTTOM w0.203: U3.16 12.51,10.43 12.51,10.44 10.72,10.44 10.36,10.79 10.36,13.28 10.57,13.48 U11.10
MOSI: length 3.7
  BOTTOM w0.203: U3.17 12.18,10.93 U11.11
N15558930_RF4: length 3.6
  TOP w0.203: v1(7.29,31.57) R30.1
  BOTTOM w0.203: U4.4 7.46,31.74 v1(7.29,31.57)
N15558930_RF5: length 2.6
  TOP w0.203: v1(-3.51,7.9) -4.22,8.61 R34.1
  BOTTOM w0.203: v1(-3.51,7.9) -3.51,7.69 -3.71,7.48 U11.4
N15558945_RF4: length 5.8
  TOP w0.203: v1(7.29,30.05) R31.1
  BOTTOM w0.203: v1(7.29,30.05) 6.6,30.73 6.6,33.58 5.46,34.72 U4.3
N15558945_RF5: length 4.9
  TOP w0.203: v1(-2.46,8.48) R35.1
  BOTTOM w0.203: U11.3 -3.43,5.48 -3.23,5.69 -3.23,6.55 -2.46,7.31 v1(-2.46,8.48)
N15601498_RF4: length 6.1
  TOP w0.762: T1.1 -0.03,34.21 U2.3
  BOTTOM w0.762: T1.1 -1.25,34.77 U4.1
N15601498_RF5: length 7.9
  TOP w1.016: U7.3 -4.17,4.93 -4.8,4.29 -4.8,2.16 -4.12,1.47 T12.1
  BOTTOM w1.016: T12.1 -2.58,1.48 U11.1
N15650649_RF4: length 9.1
  TOP w0.203: R31.2 v1(9.5,30.05)
  BOTTOM w0.203: v1(9.5,30.05) 9.55,30.1 10.9,30.1 12.75,31.95 12.75,33.25 12.98,33.48 14.32,33.48 15.46,34.61 U4.8
N15650649_RF5: length 5.9
  TOP w0.203: v1(-2.46,12.01) R35.2
  BOTTOM w0.203: U11.8 -4.28,15.48 -3.61,14.81 -3.13,14.81 -2.57,14.25 -2.57,12.12 v1(-2.46,12.01)
N15650655_RF4: length 7.4
  TOP w0.203: v1(9.5,31.14) 9.5,31.26 R30.2
  BOTTOM w0.203: v1(9.5,31.14) 9.58,31.06 9.58,31.03 10.05,30.56 10.74,30.56 12.34,32.16 12.34,33.66 U4.7
N15650655_RF5: length 4
  TOP w0.203: R34.2 -4.22,12.32 v1(-3.35,13.18)
  BOTTOM w0.203: v1(-3.35,13.18) -3.65,13.48 U11.7
N15650752_RF4: length 8.3
  TOP w0.203: R32.2 7.58,32.96 8.21,32.33 9.68,32.33 10.49,31.52 v1(10.49,31.28)
  BOTTOM w0.203: U4.6 11.94,34.29 11.94,32.56 10.65,31.28 v1(10.49,31.28)
N15650752_RF5: length 4.1
  TOP w0.203: v1(-0.97,11.23) R36.2
  BOTTOM w0.203: U11.6 -4.19,11.3 -1.04,11.3 v1(-0.97,11.23)
N15650833_RF4: length 18.4
  TOP w0.203: R6.1 6.91,34.62 6.58,34.29 6.58,28.65 5.49,27.56 5.49,25.4 v1(5.23,25.15)
  BOTTOM w0.203: U4.15 3.46,18.93 5.76,21.23 5.76,24.61 v1(5.23,25.15)
N15650833_RF5: length 4.3
  TOP w0.203: v1(8.15,3.05) 7.81,2.71 R23.1
  BOTTOM w0.203: v1(8.15,3.05) 8.58,3.48 U11.15
OPT: length 43.1
  BOTTOM w0.203: -1.25,31.62 -0.18,31.62 0.2,31.24 0.2,28.37 0.99,27.58 4.93,27.58 6.98,25.53 6.98,21.29 7.19,21.08 16.89,21.08 17.32,20.65 24.55,20.65 25.09,20.11 25.09,13.87 24.66,13.43 U3.39
PIR_IN: length 7.9
  TOP w0.203: R3.1 -2.82,19.86 -3.02,20.07 -4.85,20.07 -5.21,20.42 -5.21,23.65 -4.85,24 J4.4
RF_INT: length 25.5
  TOP w0.203: R23.2 6.21,3.42 v1(6.22,3.43) 6.22,4.19 4.49,5.92 4.49,7.8 4.16,8.13 -0.76,8.13 -0.97,8.33 R36.1
  BOTTOM w0.203: U3.13 13.94,8.93 13.53,8.53 10.85,8.53 10.58,8.26 10.58,4.91 9.63,3.96 6.76,3.96 v1(6.22,3.43)
RF_RST: length 15.7
  BOTTOM w0.203: U11.14 13.79,7.65 13.8,7.65 14.25,8.1 16.1,8.1 17.52,9.53 17.52,11 17.65,11.13 17.65,12.3 17.19,12.76 17.19,14.3 17.83,14.94 18.95,14.94 19.16,15.14 U3.30
SCK: length 3.7
  BOTTOM w0.203: U3.15 12.08,9.93 U11.12
SPI2_INT: length 27.6
  TOP w0.203: v1(16.43,13.43) 16.43,14.74 16.16,15.01 15.11,15.01 13.77,16.36 11.99,16.36 11.28,17.07 11.28,31.55 10.03,32.79 9.39,32.79 9.18,32.99 R32.1 R6.2
  BOTTOM w0.203: U3.22 v1(16.43,13.43)
SPI2_MISO: length 6.4
  BOTTOM w0.203: U4.10 13.46,17.73 13.69,17.5 16.97,17.5 17.66,16.81 U3.27
SPI2_MOSI: length 10.5
  BOTTOM w0.203: U3.28 18.16,16.89 16.69,18.35 16.69,19.56 16.38,19.86 11.66,19.86 11.46,19.66 U4.11
SPI2_RES: length 14.3
  BOTTOM w0.203: U4.14 5.46,17.35 6,16.81 7.05,16.81 7.6,16.26 9.27,16.26 9.47,16.05 9.47,14.73 9.68,14.53 12.52,14.53 12.75,14.3 12.75,13.27 13.09,12.93 U3.21
SPI2_SCK: length 10
  BOTTOM w0.203: U3.26 17.16,16.64 16.7,17.09 9.78,17.09 9.46,17.41 U4.12
SPI2_SS: length 11.7
  BOTTOM w0.203: U4.13 7.46,16.98 7.77,16.66 16.45,16.66 16.66,16.46 U3.25
SS: length 9.7
  BOTTOM w0.203: U11.13 11.63,7.85 11.84,8.05 13.63,8.05 14.08,8.5 15.93,8.5 17.12,9.69 17.12,10.37 16.05,11.43 U3.18
VOL_ADC: length 35
  TOP w0.203: v1(18.44,8.86) 17.93,8.86 17.52,9.27 17.52,11 17.65,11.13 17.65,12.52 17.93,12.8 17.93,14.61 19.61,16.29 v1(26.25,16.29)
  BOTTOM w0.203: v1(26.25,16.29) 26.9,16.94 26.9,17.63 26.31,18.21 26.31,19.46 26.75,19.89 28.15,19.89 29.97,21.71 29.97,22.88 30.92,23.83 35.15,23.83 35.36,23.62 C24.1 R44.2 ; U3.10 17.66,8.51 18.01,8.86 v1(18.44,8.86)
VREF_ADC: length 44.1
  TOP w0.203: v1(31.01,14.94) 30.35,15.6 25.78,15.6 25.5,15.88 24,15.88 v1(23.65,15.52) ; v1(43.2,14.86) 38.89,14.86 38.62,14.59 38.62,14.19 v1(38.61,14.17)
  BOTTOM w0.203: v1(23.65,15.52) 23.19,15.52 22.48,14.81 19.4,14.81 19.12,14.53 18,14.53 17.6,14.13 17.6,12.92 18.06,12.47 18.06,10.96 17.93,10.83 17.93,9.36 16.66,8.08 U3.12 ; v1(31.01,14.94) 31.98,13.97 38.4,13.97 v1(38.61,14.17) 38.62,14.19 R51.2 38.38,15.07 38.38,15.32 35.97,17.73 U12.6 U12.7 ; v1(43.2,14.86) R28.2
ZDET: length 36.5
  TOP w0.203: v1(14.62,0.77) 15.37,1.52 16.69,1.52 17.19,1.02 21.92,1.02 22.58,1.68 22.58,5.61 22.78,5.82 27.33,5.82 29.16,3.99 v1(30,3.99) 31.23,3.99 U1.3
  BOTTOM w0.203: R7.1 31.61,3.54 31.16,3.99 v1(30,3.99) T3.1 ; U3.11 17.16,6.68 16.77,6.3 13.61,6.3 13.11,5.79 13.11,0.98 13.31,0.77 v1(14.62,0.77)
N00867: length 36
  TOP w0.203: R10.1 1.76,23.48 2.08,23.17 2.08,21.26 2.51,20.82 2.51,16.64 2.31,16.43 0.74,16.43 -0.1,15.6 -0.1,13.62 0.21,13.31 1.74,13.31 2.18,12.87 2.18,12.09 2.39,11.89 7.76,11.89 9.32,10.33 9.32,9.5 11.07,7.75 14.44,7.75 15.19,8.5 16.04,8.5 16.43,8.89 v1(16.43,10.08)
  BOTTOM w0.203: v1(16.43,10.08) 16.43,9.68 16.19,9.43 U3.14
N00967: length 33.3
  TOP w0.203: v1(28.85,33.32) 32,33.32 33.63,31.7 v1(33.63,25.4)
  BOTTOM w0.203: U3.43 24.51,11.43 24.71,11.64 24.71,12.91 25.5,13.7 25.5,19.89 26.31,20.7 27.81,20.7 29.16,22.05 29.16,23.22 30.58,24.64 33.43,24.64 33.63,24.84 v1(33.63,25.4) ; v1(28.85,33.32) 29.13,33.6 R14.1
N15474073: length 9.5
  BOTTOM w0.203: R8.2 26.83,7.28 26.26,6.71 25.78,6.71 25.23,6.16 C12.1 19.86,5.97 19.16,6.68 U3.7
N15474105: length 1.8
  BOTTOM w0.203: U3.44 25.03,10.93 25.23,10.73 R9.1
N15491277: length 2.1
  TOP w0.203: R17.1 4.95,1.04 D7.2
N15550331: length 4.1
  TOP w0.203: Q2.1 -3.09,16.34 -2.82,16.61 R3.2 -2.96,17.82 -3.58,18.44 -3.58,18.77 -4.23,19.42 R24.1
N15564877: length 2
  TOP w0.203: R4.1 42.79,3.07 D1.C
N15564897: length 2
  TOP w0.203: R4.2 41.19,1.21 40.92,1.47 U1.1
N15565413: length 3.6
  BOTTOM w0.203: R15.1 29.25,35.06 29.97,34.34 30.25,34.34 30.85,33.74 R14.2 31.05,33.4 31.79,33.4 Q1.1
N15565460: length 35.1
  TOP w0.762: D6.A 35.89,34.09 v1(34.75,35.23) ; RE1.2 62.71,32.59 54.63,32.59 v1(53.54,33.68)
  BOTTOM w0.762: v1(53.54,33.68) 51.97,35.26 34.77,35.26 v1(34.75,35.23) 34.75,34.64 Q1.3
N15594848: length 2.2
  TOP w0.203: U14.3 1.88,20.4 1.55,20.73 1.55,21.65 R10.2
N15594876: length 10.2
  TOP w0.203: U14.5 0.61,15.7 0.94,16.03 2.47,16.03 2.92,16.47 2.92,18.03 3.43,18.54 3.96,18.54 4.42,19 U14.1 4.42,21.83 R12.2
N15594888: length 4.5
  TOP w0.203: R12.1 4.2,23.48 3.61,22.89 3.61,22.54 2.96,21.88 R11.1 2.84,21.39 3.15,21.08 U14.2
N15595203: length 18.7
  TOP w0.508: D8.1 20.46,6.32 21.2,7.06 27.69,7.06 28.83,5.92 31.95,5.92 v1(33.22,7.19)
  BOTTOM w0.508: v1(33.22,7.19) 34.61,8.57 R33.1
N15595433: length 10.8
  TOP w0.508: U14.8 4.42,15.54 5.89,17.02 C4.1 R5.2 8.61,17.22 DZ1.2 8.26,19.74 R1.1
N15595748: length 27.4
  TOP w0.203: R13.1 3.15,12.87 U14.7 U14.6 v1(1.88,15.27)
  BOTTOM w0.203: v1(1.88,15.27) -1.17,15.27 -2.24,16.33 -2.24,18.95 -2.54,19.25 -5,19.25 -5.21,19.46 -5.21,31.29 v1(-4.88,31.62) -3.79,31.62
  vias: v1(-4.83,32.59) v1(-4.67,30.78)
N15595994: length 32.7
  TOP w0.203: J4.5 0.5,26.54 R18.2
  BOTTOM w0.203: J4.5 -1.02,26.77 4.59,26.77 6.17,25.19 6.17,20.7 6.6,20.27 16.55,20.27 17.09,19.73 17.09,18.52 17.76,17.86 19.21,17.86 19.49,17.58 19.88,17.58 20.46,16.99 20.95,16.99 21.16,16.79 U3.34
N15596016: length 41.2
  TOP w0.203: J4.7 -1.25,28.5 -0.69,27.94 R19.2
  BOTTOM w0.203: J4.7 0.66,27.18 4.76,27.18 6.58,25.36 6.58,20.98 6.88,20.68 16.72,20.68 17.15,20.24 24.38,20.24 24.69,19.94 24.69,14.87 24.26,14.43 U3.37
N15599824: length 1.2
  BOTTOM w0.203: R38.1 R37.2
N15599840: length 1.2
  BOTTOM w0.203: R39.1 R38.2
N15599857: length 1.2
  BOTTOM w0.203: R40.1 R39.2
N15599867: length 1.4
  BOTTOM w0.203: R40.2 R41.1
N15599873: length 1.2
  BOTTOM w0.203: R42.1 R41.2
N15599887: length 1.2
  BOTTOM w0.203: R45.2 R46.1
N15599893: length 1.2
  BOTTOM w0.203: R46.2 R47.1
N15599899: length 1.2
  BOTTOM w0.203: R47.2 R48.1
N15599905: length 1.3
  BOTTOM w0.203: R48.2 R49.1
N15599911: length 1.2
  BOTTOM w0.203: R49.2 R50.1
N15600412: length 11
  TOP w0.203: v1(39.27,23.11) 41.27,25.12 v1(41.86,25.12)
  BOTTOM w0.203: v1(41.86,25.12) 41.87,25.11 R42.2 ; R43.1 39.25,23.1 v1(39.27,23.11) 39.52,22.86 39.52,21.72 40.51,20.73 40.51,19.33 40.18,19 U12.2
N15600419: length 14.1
  BOTTOM w0.203: 40.82,14.83 R51.1 40.22,14.97 40.54,15.29 40.54,17.53 40.33,17.73 U12.3 ; 40.82,14.83 41.03,14.83 ; 40.82,14.83 40.84,14.86 41.71,14.86 42.49,14.07 R50.2
N15600461: length 3.4
  BOTTOM w0.203: U12.1 38.78,20.27 38.58,20.47 38.58,21.3 R43.2 38.35,21.53 R44.1
N15606589: length 38.5
  TOP w0.203: R2.2 -1.3,15.81 Q2.3 -0.51,15.02 -0.51,13.37 -0.04,12.9 1.57,12.9 1.78,12.7 1.78,11.68 1.98,11.48 7.59,11.48 8.91,10.16 8.91,9.33 10.91,7.34 14.61,7.34 15.36,8.1 16.21,8.1 17.12,9.01 17.12,10.46 16.25,11.33 16.25,12.27 17.12,13.13 17.12,15.04 18.9,16.81 v1(18.9,17.17)
  BOTTOM w0.203: U3.32 20.16,16.72 19.71,17.17 v1(18.9,17.17)
N15830972: length 10.2
  TOP w0.508: 25.04,23.95 24.53,23.44 24.21,23.44 v1(23.9,23.14) v1(23.9,23.85) 23.97,23.78 24.69,23.78 L1.1 25.04,23.95 ; 25.04,23.95 25.04,19.81 D4.C
  BOTTOM w0.508: U6.2 24.13,22.91 v1(23.9,23.14) v1(23.9,23.85)
N15831035: length 3.4
  BOTTOM w0.203: R53.1 R52.2 34.63,16.12 34.29,16.46 U12.5
N15831096: length 8.4
  BOTTOM w0.508: 25.4,23.39 U6.8 U6.7 ; 25.4,23.39 U6.1 ; 25.4,23.39 R20.2
N15831168: length 3.7
  BOTTOM w0.508: C17.1 20.59,23 20.73,23.14 22.35,23.14 22.86,22.64 U6.3
N15831176: length 2.8
  BOTTOM w0.508: R21.2 R22.1 21.26,26.99 U6.5
N15832751: length 30.7
  TOP w0.203: CT1.1 69.73,11.18 55.18,11.18 52.47,13.89 50.27,13.89 49.94,14.22 v1(49.9,14.22)
  BOTTOM w0.203: R26.2 C25.1 R25.2 51.68,17.21 50.48,16.01 50.48,15.51 49.9,14.92 v1(49.9,14.22)
N15832799: length 19.2
  TOP w0.203: v1(48.47,13.97) 48.96,13.49 52.3,13.49 56.39,9.4 CT1.2
  BOTTOM w0.203: R27.2 49.15,14.86 50.08,15.79 R25.1 C25.2 ; R27.2 48.48,14.85 ; R27.2 v1(48.47,13.97)
N15832926: length 6.5
  BOTTOM w0.203: R28.1 R27.1 46.87,14.97 47.57,15.67 48.87,15.67 49.1,15.9 49.1,17.02 48.36,17.75 47.94,17.75 U10.3
N15832941: length 4.4
  BOTTOM w0.203: U10.2 48.44,19 49.22,19.79 49.48,19.79 50.08,20.38 R26.1 R29.1
N15833292: length 7.7
  BOTTOM w0.203: 47.91,21.53 U10.1 47.93,20.29 ; 47.91,21.53 R54.1 ; 47.91,21.53 48.21,21.53 48.41,21.73 48.41,22.68 48.61,22.89 51.47,22.89 51.68,22.68 R29.2

## Copper pours and planes (outline as drawn; the poured copper is in the pictures)
24V on BOTTOM (solid shape): 39.98,4.83 39.98,0.74 39.65,0.41 33.48,0.41 33.27,0.61 33.27,5.05 39.75,5.05
+3.3V on BOTTOM (solid shape): 24.23,35.51 24.23,33.66 24.56,33.32 26.92,33.32 27.03,33.22 27.08,33.22 27.08,32.11 26.95,31.98 24.56,31.98 24.31,31.72 24.31,29.92 23.93,29.54 21.97,29.54 21.29,30.23 19.02,30.23 18.87,30.38 18.87,34.8 19.76,35.69 24.05,35.69
GND on TOP: 42.01,0.38 42.01,5.13 37.9,5.13 37.9,0.41 -5.31,0.41 -5.31,35.69 39.06,35.69 40.13,34.62 40.13,29.87 40.99,29.01 43.33,29.01 47.52,24.82 47.52,2.21 45.69,0.38 ; 9 cut-outs
GND on BOTTOM: 36.85,0.38 -5.31,0.38 -5.31,35.69 39.06,35.69 40.13,34.62 40.13,31.39 38.4,29.67 38.4,21.03 38.58,20.85 46.68,20.85 47.52,20.02 47.52,12.55 46.86,11.89 38.51,11.89 37.57,10.95 37.57,1.09 ; 15 cut-outs
AC_LINE on TOP (solid shape): 69.59,18.41 69.59,16.41 68.71,15.52 55.73,15.52 54.76,16.48 54.76,19.63 54.79,19.66 68.35,19.66
AC_LINE_IN on TOP (solid shape): 74.75,4.67 74.75,0.58 74.55,0.38 60.02,0.38 59.36,1.04 59.36,4.24 60.6,5.49 73.94,5.49
AC_LINE_IN on BOTTOM (solid shape): 74.75,4.67 74.75,0.58 74.55,0.38 60.02,0.38 59.36,1.04 59.36,4.24 60.63,5.51 73.91,5.51
AC_LOAD on TOP (solid shape): 74.42,33.66 74.42,29.36 71.47,26.42 61.82,26.42 59.08,23.67 59.08,23.42 58.77,23.11 56.21,23.11 55.7,23.62 55.7,27.81 58.14,30.25 65.99,30.25 70.33,34.59 73.48,34.59
AC_LOAD on BOTTOM (solid shape): 74.42,33.66 74.42,29.36 71.47,26.42 61.82,26.42 59.08,23.67 59.08,23.42 58.77,23.11 56.21,23.11 55.7,23.62 55.7,27.81 58.14,30.25 65.99,30.25 70.33,34.59 73.48,34.59
PIR_IN on TOP (solid shape): -2.82,24.38 -2.82,23.34 -3.35,22.81 -5.03,22.81 -5.31,23.09 -5.31,24.87 -5.08,25.1 -3.53,25.1
PIR_IN on BOTTOM (solid shape): -2.82,24.38 -2.82,23.34 -3.35,22.81 -4.62,22.81 -4.78,22.96 -4.78,24.99 -4.67,25.1 -3.53,25.1
N15595203 on BOTTOM (solid shape): 37.18,11.4 37.18,6.93 36.96,6.71 32.36,6.71 32,7.06 32,9.3 30.71,10.59 30.71,11.25 31.29,11.84 36.75,11.84
N15595748 on TOP (solid shape): -2.8,32.08 -2.8,31.17 -3.56,30.4 -5.21,30.4 -5.31,30.51 -5.31,33.02 -5.13,33.2 -3.91,33.2
N15595748 on BOTTOM (solid shape): -2.8,32.08 -2.8,31.17 -3.56,30.4 -5.21,30.4 -5.31,30.51 -5.31,33.02 -5.13,33.2 -3.91,33.2
AC_LINE on BOTTOM (solid shape): 59.18,18.31 59.36,18.24 59.43,18.06 59.43,15.77 59.36,15.59 59.18,15.52 55.98,15.52 55.8,15.59 55.73,15.77 55.73,18.06 55.8,18.24 55.98,18.31
AC_NEUTRAL on TOP (solid shape): 74.52,24.69 74.66,24.65 74.75,24.55 74.75,21.35 74.66,21.25 74.52,21.21 70.23,21.21 70.05,21.28 69.98,21.46 69.98,24.43 70.05,24.61 70.23,24.69
AC_NEUTRAL on BOTTOM (solid shape): 74.5,24.69 74.68,24.62 74.75,24.44 74.75,21.46 74.68,21.28 74.5,21.21 70.23,21.21 70.05,21.28 69.98,21.46 69.98,24.43 70.05,24.61 70.23,24.69

Small or netless copper shapes (teardrops, artwork), in the pictures only: 173 on TOP, 252 on BOTTOM

## Text on the board
Ref Des/Silkscreen Bottom: 11/2024 | SLAVE | hw01 | Name | Version | Date | Designed by TK | LOAD | LINE | NEUTRAL | 3.3V | DIM | PIR | GND | OPT | SWC | SWD
Ref Des/Silkscreen Top: LINE | NEUTRAL | LOAD
DEVICE_TYPE_BOTTOM: FIGURE | FINISHED_SIZE | 15.0 | 33.461 | 42.0 | 52.0 | 60.0 | 80.0 | DRILL CHART: TOP to BOTTOM | ALL UNITS ARE IN MILS | PLATED | QTY | 265 | 2 | 1 | 11 | 4 | 10
